# Altium PCB 上板20190911.PCBDOC
Units mm, origin at the board's own origin, x right, y up, seen from the top; angles counter-clockwise.
Board outline 146 x 71.5 mm, 2 copper layers (Top Layer, Bottom Layer); 4 components, 41 nets, 122 pads, 0 vias.
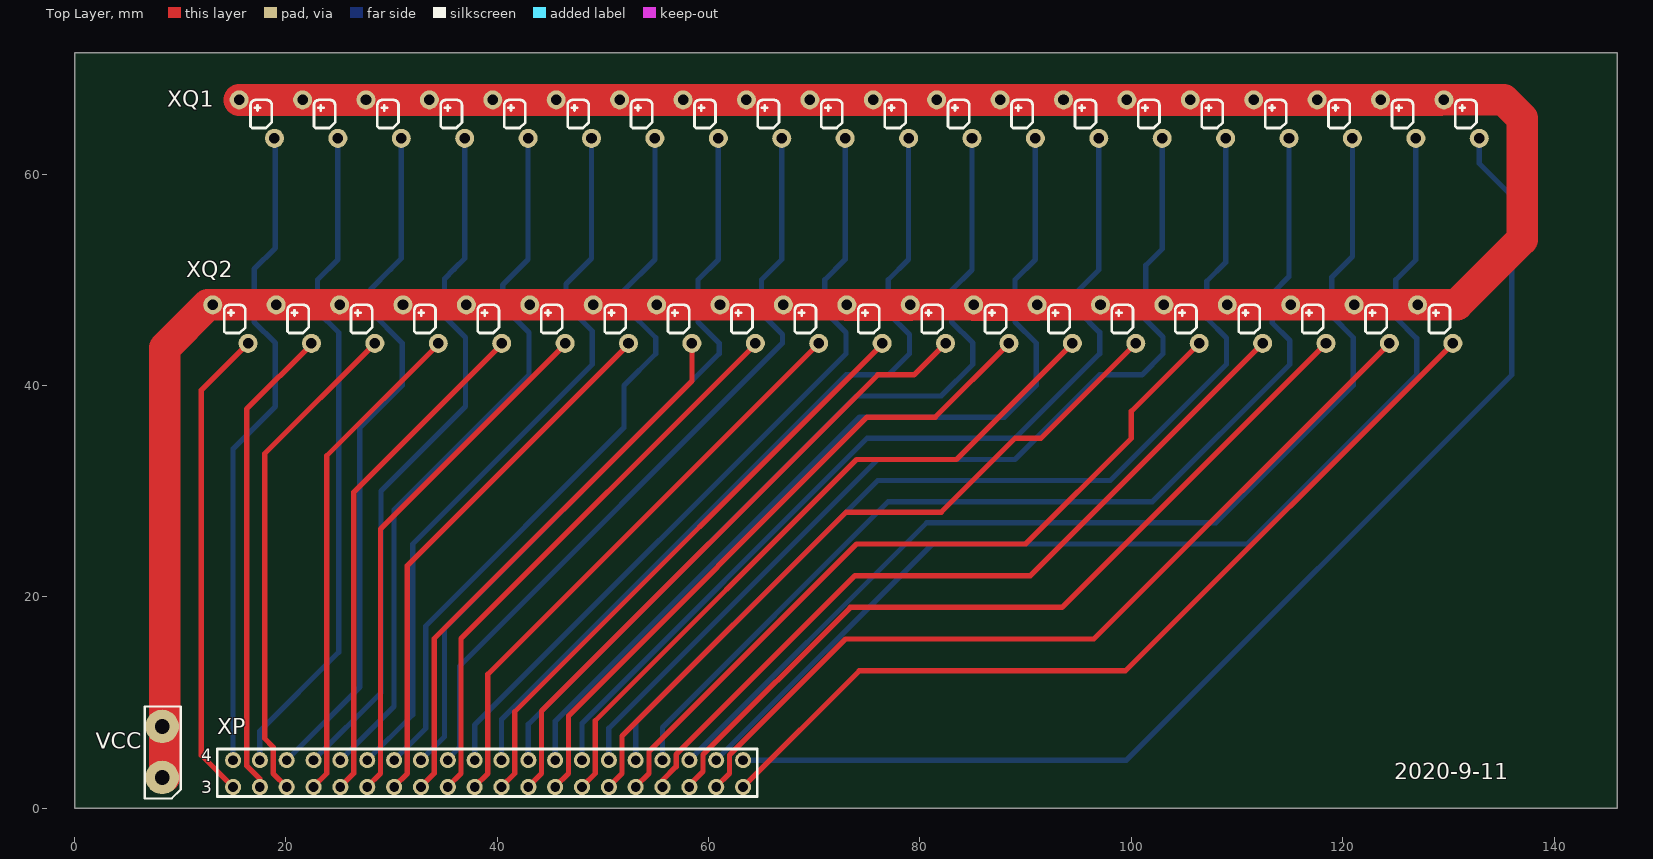
[diagram p0: Top Layer view]
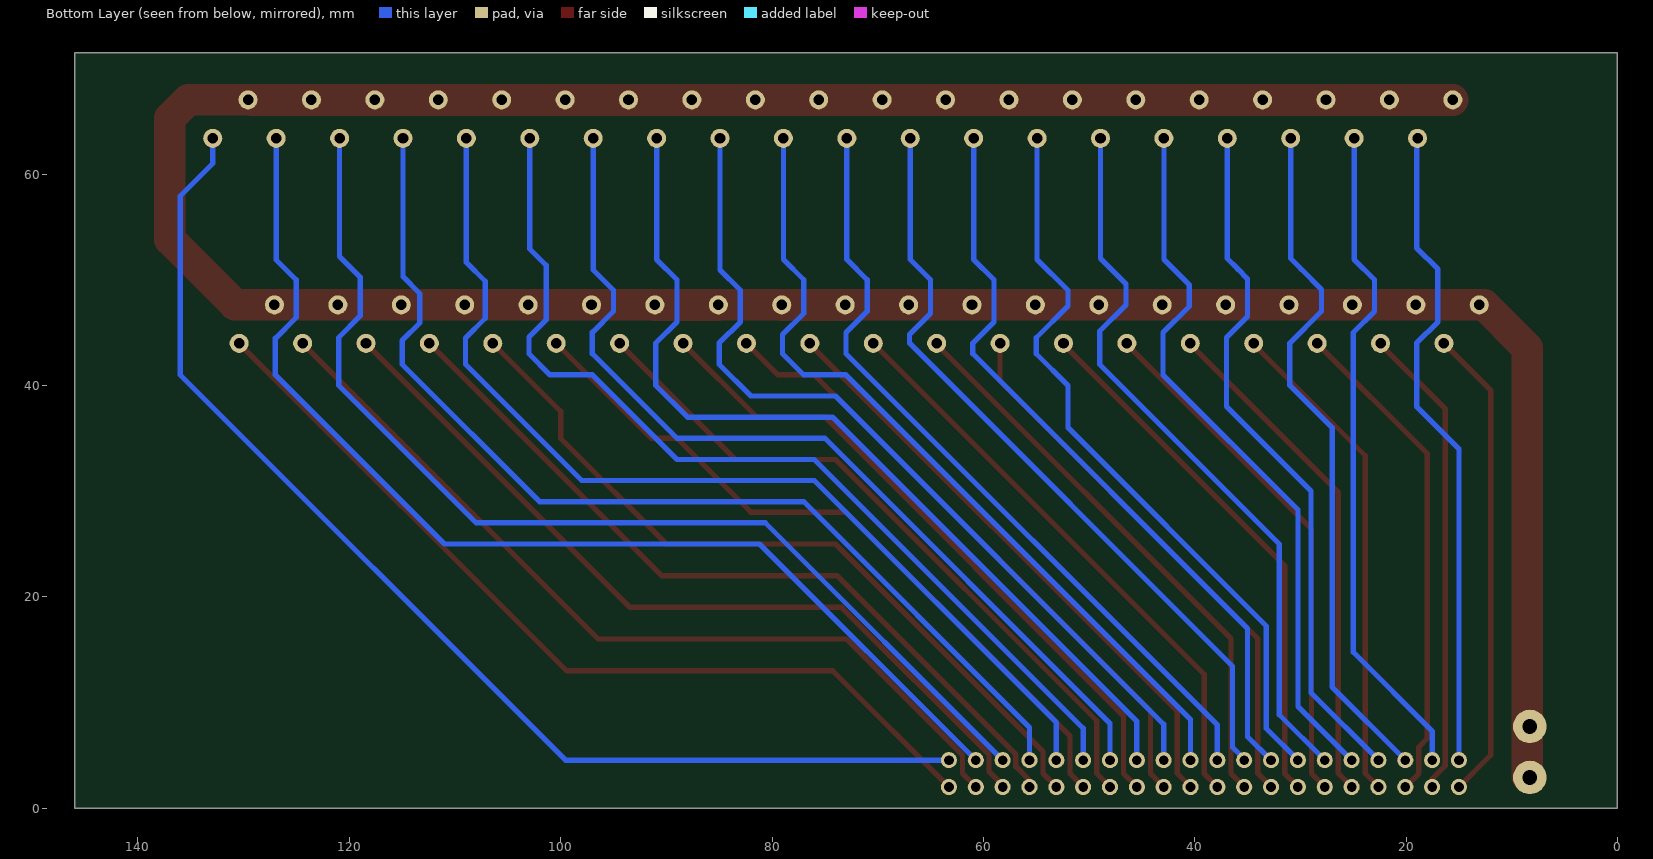
[diagram p1: Bottom Layer view, seen from below]

## Layer stack, top to bottom
Top Solder: solder mask 0.0102, Solder Resist, Dk 3.5
Top Layer: signal copper 0.0356
Dielectric1: dielectric 0.32, FR-4, Dk 4.8
Bottom Layer: signal copper 0.0356
Bottom Solder: solder mask 0.0102, Solder Resist, Dk 3.5

## Board outline
0,0 0,71.5 146,71.5 146,0

## Design rules (kind name [scope] priority, off if disabled: settings)
Clearance [All] p1: gap=0.152 ignorepadtopadclearanceinfootprint=FALSE
DiffPairsRouting [All] p1: maxlimit=0.254 minlimit=0.254 mostfreqgap=0.254 toplayer_minwidth=0.381 toplayer_maxwidth=4 toplayer_prefwidth=0.381 bottomlayer_minwidth=0.381 bottomlayer_maxwidth=4 bottomlayer_prefwidth=0.381 maxuncoupledlength=12.7
FabricationTestPointUsage TestPointUsage [All] p1: valid=0 allowmultiple=FALSE
FabricationTestpoint Testpoint [All] p1: side=3 testpointundercomponent=TRUE minsize=1.016 maxsize=2.54 preferedsize=1.524 minholesize=0 maxholesize=1.016 preferedholesize=0.813 testpointgrid=0.025 allowsidetop=TRUE allowsidebottom=TRUE usegrid=TRUE gridtolerance=0
PolygonConnect [All] p1: connectstyle=Relief reliefconductorwidth=0.254 reliefentries=4 polygonreliefangle="90 Angle" airgapwidth=0.254
RoutingLayers [All] p1: top layer_v5=FALSE bottom layer_v5=TRUE
RoutingVias [All] p1: holewidth=0.8 width=1.6 viastyle="Through Hole" minholewidth=0.711 minwidth=1.27 maxholewidth=0.711 maxwidth=1.27
SilkToSolderMaskClearance SilkscreenOverComponentPads [IsPad] p1: minsilkscreentomaskgap=0.254 clearancetoexposedcopper=TRUE
SolderMaskExpansion [All] p1: expansion=0.102 istentingtop=FALSE
Width [All] p1: maxlimit=3.048 minlimit=0.254 preferedwidth=0.381 minimp=50.000000 maximp=50.000000 favimp=50.000000
25 further rules are at their usual default settings.

## Components (designator, comment, footprint, x,y, rotation, side; value= is the part's Value field where it differs from the comment)
XP "Header 21X2" XinPian 15,2 r180 top
XQ1 "Comment" XIANQUAN1 15.58,67.02 r0 top
XQ2 "Comment" XIANQUAN1 13.08,47.62 r0 top
? "" N1A 8.296,7.736 r180 top

## Footprints (in the part's own frame and the unit in brackets; to place one, negate y for a bottom-side part, rotate by r counter-clockwise, add the part's x,y. Pads: shape width x height; smd on the part's side, far side on the other; paste and mask are expansions set on the pad)
N1A [mil]
  round 125 hole 55: 1(0,0) 2(0,190)
  silkscreen extent -69,-74 65,268
XIANQUAN1 [mm]
  round 1.8 hole 1: 1(3.34,-3.64) 1(9.34,-3.64) 1(15.34,-3.64) 1(21.34,-3.64) 1(27.34,-3.64) 1(33.34,-3.64) 1(39.34,-3.64) 1(45.34,-3.64) 1(51.34,-3.64) 1(57.34,-3.64) 1(63.34,-3.64) 1(69.34,-3.64) 1(75.34,-3.64) 1(81.34,-3.64) 1(87.34,-3.64) 1(93.34,-3.64) 1(99.34,-3.64) 1(105.34,-3.64) 1(111.34,-3.64) 1(117.34,-3.64) 2(0,0) 2(6,0) 2(12,0) 2(18,0) 2(24,0) 2(30,0) 2(36,0) 2(42,0) 2(48,0) 2(54,0) 2(60,0) 2(66,0) 2(72,0) 2(78,0) 2(84,0) 2(90,0) 2(96,0) 2(102,0) 2(108,0) 2(114,0)
  silkscreen extent 1.08,-2.67 117.08,0
XinPian [mil]
  round 60 hole 36: 1(0,-100) 2(-100,-100) 3(-200,-100) 4(-300,-100) 5(-400,-100) 6(-500,-100) 7(-600,-100) 8(-700,-100) 9(-800,-100) 10(-900,-100) 11(-1000,-100) 12(-1100,-100) 13(-1200,-100) 14(-1300,-100) 15(-1400,-100) 16(-1500,-100) 17(-1600,-100) 18(-1700,-100) 19(-1800,-100) 20(-1900,-100) 21(-1900,0) 22(-1800,0) 23(-1700,0) 24(-1600,0) 25(-1500,0) 26(-1400,0) 27(-1300,0) 28(-1200,0) 29(-1100,0) 30(-1000,0) 31(-900,0) 32(-800,0) 33(-700,0) 34(-600,0) 35(-500,0) 36(-400,0) 37(-300,0) 38(-200,0) 39(-100,0) 40(0,0)
  silkscreen extent -1953,-142 59,35

## Part data
XP: library part "Header 22X2", "Header, 22-Pin, Dual row"

## Nets (pads, with @x,y where several pads share a name; then routed paths per layer and width w, separated by ;. In a path a pad name is that pad's centre, name@x,y a point inside that pad or via, vN(x,y) a via of type N, cw(c..) or ccw(c..) an arc to the next point about the centre after c; other vN are vias at no path point)
GND: ?.1 ?.2 XQ1.2 XQ2.2 | length 307
  Top Layer w3: ?.1@8.376,7.736 8.329,7.784 8.329,7.817 8.54,8.028 8.54,43.54 12.62,47.62 13.08,47.62 19.08,47.62 25.08,47.62 31.08,47.62 37.08,47.62 43.08,47.62 49.08,47.62 55.08,47.62 61.08,47.62 67.08,47.62 73.08,47.62 73.09,47.61 79.07,47.61 79.08,47.62 85.08,47.62 85.09,47.61 91.07,47.61 91.08,47.62 97.08,47.62 103.08,47.62 109.08,47.62 115.08,47.62 121.08,47.62 127.08,47.62 130.809,47.62 137,53.811 137,65.273 135.243,67.03 129.58,67.03 129.261,67.03 129.231,67 123.58,67 117.58,67 111.58,67 105.58,67 99.58,67 93.58,67 87.58,67 81.58,67 75.58,67 69.58,67 69.231,67 63.58,67 57.58,67 51.58,67 45.58,67 39.58,67 33.58,67 27.58,67 21.58,67 XQ1.2@15.58,67 ; ?.2@8.54,3 ?.1@8.54,7.736
XQ1_1: XP.20 XQ1.1@132.92,63.38 | length 111.5
  Bottom Layer w0.5: XP.20 99.54,4.54 136,41 136,57.931 132.92,61.011 XQ1.1@132.92,63.38
XQ1_2: XP.19 XQ1.1@126.92,63.38 | length 105.4
  Bottom Layer w0.5: XP.19 81.18,25 111,25 127,41 127,44.45 125.019,46.431 125.019,49.987 126.92,51.888 XQ1.1@126.92,63.38
XQ1_3: XP.18 XQ1.1@120.92,63.38 | length 102.5
  Bottom Layer w0.5: XP.18 80.64,27 108,27 121,40 121,44.532 118.974,46.558 118.974,50.267 120.92,52.213 XQ1.1@120.92,63.38
XQ1_4: XP.17 XQ1.1@114.92,63.38 | length 99.4
  Bottom Layer w0.5: XP.17 55.64,7.64 77,29 102,29 115,42 115,44.233 113.335,45.898 113.335,48.705 114.92,50.29 XQ1.1@114.92,63.38
XQ1_5: XP.16 XQ1.1@108.92,63.38 | length 96.4
  Bottom Layer w0.5: XP.16 53.1,8.1 76,31 98,31 109,42 109,44.492 107.137,46.355 107.137,49.86 108.92,51.643 XQ1.1@108.92,63.38
XQ1_6: XP.15 XQ1.1@102.92,63.38 | length 91.8
  Bottom Layer w0.5: XP.15 50.56,7.56 76,33 89,33 97,41 101,41 103,43 103,44.574 101.371,46.203 101.371,51.371 102.92,52.92 XQ1.1@102.92,63.38
XQ1_7: XP.14 XQ1.1@96.92,63.38 | length 89
  Bottom Layer w0.5: XP.14 48.02,8.02 75,35 89,35 97,43 97,45.019 95,47.019 95,49 96.92,50.92 XQ1.1@96.92,63.38
XQ1_8: XP.13 XQ1.1@90.92,63.38 | length 87.4
  Bottom Layer w0.5: XP.13 45.48,8.209 74.271,37 88,37 91,40 91,44 89,46 89,50 90.92,51.92 XQ1.1@90.92,63.38
XQ1_9: XP.12 XQ1.1@84.92,63.38 | length 82.6
  Bottom Layer w0.5: XP.12 42.94,7.94 74,39 82,39 85,42 85,44 83,46 83,49 84.92,50.92 XQ1.1@84.92,63.38
XQ1_10: XP.11 XQ1.1@78.92,63.38 | length 78.8
  Bottom Layer w0.5: XP.11 40.4,8.4 73,41 77,41 79,43 79,44.803 77,46.803 77,50 78.92,51.92 XQ1.1@78.92,63.38
XQ1_11: XP.10 XQ1.1@72.92,63.38 | length 75
  Bottom Layer w0.5: XP.10 37.86,7.86 73,43 73,45 71,47 71,50 72.92,51.92 XQ1.1@72.92,63.38
XQ1_12: XP.9 XQ1.1@66.92,63.38 | length 73.6
  Bottom Layer w0.5: XP.9 35.32,4.665 36.423,5.768 36.423,13.423 67,44 67,44.803 65,46.803 65,50 66.92,51.92 XQ1.1@66.92,63.38
XQ1_13: XP.8 XQ1.1@60.92,63.38 | length 72.2
  Bottom Layer w0.5: XP.8 35,6.76 35,17 61,43 61,44 59,46 59,50 60.92,51.92 XQ1.1@60.92,63.38
XQ1_14: XP.7 XQ1.1@54.92,63.38 | length 71.5
  Bottom Layer w0.5: XP.7 33.231,7.531 33.231,17.231 52,36 52,40 55,43 55,44.51 52,47.51 52,49 54.92,51.92 XQ1.1@54.92,63.38
XQ1_15: XP.6 XQ1.1@48.92,63.38 | length 69.7
  Bottom Layer w0.5: XP.6 32,8.84 32,25 49,42 49,45.13 46.51,47.62 46.51,49.591 47.919,51 48.92,52.001 XQ1.1@48.92,63.38
XQ1_16: XP.5 XQ1.1@42.92,63.38 | length 68.3
  Bottom Layer w0.5: XP.5 30.24,9.62 30.24,28.24 43,41 43,45 40.51,47.49 40.51,49.51 42.92,51.92 XQ1.1@42.92,63.38
XQ1_17: XP.4 XQ1.1@36.92,63.38 | length 66.4
  Bottom Layer w0.5: XP.4 29,10.92 29,30 37,38 37,44.529 35,46.529 35,50.081 35.919,51 36.92,52.001 XQ1.1@36.92,63.38
XQ1_18: XP.3 XQ1.1@30.92,63.38 | length 65.8
  Bottom Layer w0.5: XP.3 27,11.46 27,36 31,40 31,44.019 28,47.019 28,49.081 29.919,51 30.92,52.001 XQ1.1@30.92,63.38
XQ1_19: XP.2 XQ1.1@24.92,63.38 | length 63.6
  Bottom Layer w0.5: XP.2 17.54,7.3 25,14.76 25,45 23,47 23,50 24.92,51.92 XQ1.1@24.92,63.38
XQ1_20: XP.1 XQ1.1@18.92,63.38 | length 62.2
  Bottom Layer w0.5: XP.1 15,34 19,38 19,44 17,46 17,51 19,53 19,63.37 XQ1.1@19.01,63.38
XQ2_1: XP.21 XQ2.1@130.42,43.98 | length 84.5
  Top Layer w0.5: XP.21 74.26,13 99.44,13 XQ2.1@130.42,43.98
XQ2_2: XP.22 XQ2.1@124.42,43.98 | length 82.1
  Top Layer w0.381: XP.22 XP.22@60.72,2.035
  Top Layer w0.5: XP.22@60.72,2.035 61.972,3.287 61.972,5.024 72.949,16 96.44,16 XQ2.1@124.42,43.98
XQ2_3: XP.23 XQ2.1@118.42,43.98 | length 78.7
  Top Layer w0.381: XP.23 XP.23@58.18,2.18
  Top Layer w0.5: XP.23@58.18,2.18 59.467,3.467 59.467,5.059 73.409,19 93.44,19 XQ2.1@118.42,43.98
XQ2_4: XP.24 XQ2.1@112.42,43.98 | length 75.2
  Top Layer w0.381: XP.24 XP.24@55.64,2.64
  Top Layer w0.5: XP.24@55.64,2.64 56.927,3.928 56.927,5.059 73.869,22 90.44,22 XQ2.1@112.42,43.98
XQ2_5: XP.25 XQ2.1@106.42,43.98 | length 73.4
  Top Layer w0.381: XP.25 XP.25@53.1,2.035
  Top Layer w0.5: XP.25@53.1,2.035 54.352,3.287 54.352,5.352 74,25 90,25 100,35 100,37.56 XQ2.1@106.42,43.98
XQ2_6: XP.26 XQ2.1@100.42,43.98 | length 69.3
  Top Layer w0.381: XP.26 XP.26@50.56,2.035
  Top Layer w0.5: XP.26@50.56,2.035 51.812,3.287 51.812,6.812 73,28 82,28 89,35 91.44,35 XQ2.1@100.42,43.98
XQ2_7: XP.27 XQ2.1@94.42,43.98 | length 66.7
  Top Layer w0.381: XP.27 XP.27@48.02,2.035
  Top Layer w0.5: XP.27@48.02,2.035 49.272,3.287 49.272,8.272 74,33 83.44,33 XQ2.1@94.42,43.98
XQ2_8: XP.28 XQ2.1@88.42,43.98 | length 63.5
  Top Layer w0.381: XP.28 XP.28@45.48,2.035
  Top Layer w0.5: XP.28@45.48,2.035 46.732,3.287 46.732,8.732 75,37 81.44,37 XQ2.1@88.42,43.98
XQ2_9: XP.29 XQ2.1@82.42,43.98 | length 60.3
  Top Layer w0.381: XP.29 XP.29@42.94,2.035
  Top Layer w0.5: XP.29@42.94,2.035 44.192,3.287 44.192,5.383 44.192,9.192 76,41 79.44,41 XQ2.1@82.42,43.98
XQ2_10: XP.30 XQ2.1@76.42,43.98 | length 56.9
  Top Layer w0.381: XP.30 XP.30@40.4,2.035
  Top Layer w0.5: XP.30@40.4,2.035 41.652,3.287 41.652,9.122 XQ2.1@76.51,43.98
XQ2_11: XP.31 XQ2.1@70.42,43.98 | length 55.5
  Top Layer w0.381: XP.31 XP.31@37.86,2.035
  Top Layer w0.5: XP.31@37.86,2.035 39.112,3.287 39.112,12.672 XQ2.1@70.42,43.98
XQ2_12: XP.32 XQ2.1@64.42,43.98 | length 54.1
  Top Layer w0.381: XP.32 XP.32@35.32,2.035
  Top Layer w0.5: XP.32@35.32,2.035 36.572,3.287 36.572,16.042 XQ2.1@64.51,43.98
XQ2_13: XP.33 XQ2.1@58.42,43.98 | length 52.6
  Top Layer w0.381: XP.33 XP.33@32.78,2.035
  Top Layer w0.5: XP.33@32.78,2.035 34.032,3.287 34.032,16.032 58.42,40.42 XQ2.1@58.42,43.98
XQ2_14: XP.34 XQ2.1@52.42,43.98 | length 51.2
  Top Layer w0.381: XP.34 XP.34@30.24,2.035
  Top Layer w0.5: XP.34@30.24,2.035 31.492,3.287 31.492,22.962 XQ2.1@52.51,43.98
XQ2_15: XP.35 XQ2.1@46.42,43.98 | length 49.8
  Top Layer w0.381: XP.35 XP.35@27.7,2.035
  Top Layer w0.5: XP.35@27.7,2.035 28.952,3.287 28.952,26.422 XQ2.1@46.51,43.98
XQ2_16: XP.36 XQ2.1@40.42,43.98 | length 48.3
  Top Layer w0.381: XP.36 XP.36@25.16,2.035
  Top Layer w0.5: XP.36@25.16,2.035 26.412,3.287 26.412,29.882 XQ2.1@40.51,43.98
XQ2_17: XP.37 XQ2.1@34.42,43.98 | length 46.9
  Top Layer w0.381: XP.37 XP.37@22.62,2.035
  Top Layer w0.5: XP.37@22.62,2.035 23.872,3.287 23.872,33.342 XQ2.1@34.51,43.98
XQ2_18: XP.38 XQ2.1@28.42,43.98 | length 47.2
  Top Layer w0.5: XP.38 18.792,3.287 18.792,5.792 18,6.585 18,33.56 XQ2.1@28.42,43.98
XQ2_19: XP.39 XQ2.1@22.42,43.98 | length 45.1
  Top Layer w0.5: XP.39 17.54,2.769 16.287,4.021 16.287,37.757 XQ2.1@22.51,43.98
XQ2_20: XP.40 XQ2.1@16.42,43.98 | length 45.1
  Top Layer w0.5: XP.40 12,5 12,39.56 XQ2.1@16.42,43.98

## Silkscreen, mask and mechanical layers (free items; w line width, h text height)
Top Overlay:
  text "VCC" at 2,5.6 h1.52
  text "4" at 12,4 h2.02
  text "2020-9-11" at 124.86,2.756 h1.52
  text "3" at 12,1 h2.02
Mechanical 1:
  circle w0.254: c5.5,61 r1.5
  circle w0.254: c14.75,57.99 r0.65
  circle w0.254: c17.25,57.99 r0.65
  circle w0.254: c14.75,55.49 r0.65
  circle w0.254: c71.25,55.49 r0.65
  circle w0.254: c71.25,57.99 r0.65
  circle w0.254: c71.25,52.99 r0.65
  circle w0.254: c68.75,55.49 r0.65
  circle w0.254: c68.75,57.99 r0.65
  circle w0.254: c68.75,52.99 r0.65
  circle w0.254: c74.75,52.99 r0.65
  circle w0.254: c74.75,57.99 r0.65
  circle w0.254: c74.75,55.49 r0.65
  circle w0.254: c77.25,52.99 r0.65
  circle w0.254: c77.25,57.99 r0.65
  circle w0.254: c77.25,55.49 r0.65
  circle w0.254: c80.75,52.99 r0.65
  circle w0.254: c80.75,57.99 r0.65
  circle w0.254: c80.75,55.49 r0.65
  circle w0.254: c83.25,52.99 r0.65
  circle w0.254: c83.25,57.99 r0.65
  circle w0.254: c83.25,55.49 r0.65
  circle w0.254: c86.75,52.99 r0.65
  circle w0.254: c86.75,57.99 r0.65
  circle w0.254: c86.75,55.49 r0.65
  circle w0.254: c89.25,52.99 r0.65
  circle w0.254: c89.25,57.99 r0.65
  circle w0.254: c89.25,55.49 r0.65
  circle w0.254: c92.75,52.99 r0.65
  circle w0.254: c92.75,57.99 r0.65
  circle w0.254: c92.75,55.49 r0.65
  circle w0.254: c95.25,52.99 r0.65
  circle w0.254: c95.25,57.99 r0.65
  circle w0.254: c95.25,55.49 r0.65
  circle w0.254: c98.75,52.99 r0.65
  circle w0.254: c98.75,57.99 r0.65
  circle w0.254: c98.75,55.49 r0.65
  circle w0.254: c101.25,52.99 r0.65
  circle w0.254: c101.25,57.99 r0.65
  circle w0.254: c101.25,55.49 r0.65
  circle w0.254: c104.75,52.99 r0.65
  circle w0.254: c104.75,57.99 r0.65
  circle w0.254: c104.75,55.49 r0.65
  circle w0.254: c107.25,52.99 r0.65
  circle w0.254: c107.25,57.99 r0.65
  circle w0.254: c107.25,55.49 r0.65
  circle w0.254: c110.75,52.99 r0.65
  circle w0.254: c110.75,57.99 r0.65
  circle w0.254: c110.75,55.49 r0.65
  circle w0.254: c113.25,52.99 r0.65
  circle w0.254: c113.25,57.99 r0.65
  circle w0.254: c113.25,55.49 r0.65
  circle w0.254: c116.75,52.99 r0.65
  circle w0.254: c116.75,57.99 r0.65
  circle w0.254: c116.75,55.49 r0.65
  circle w0.254: c119.25,52.99 r0.65
  circle w0.254: c119.25,57.99 r0.65
  circle w0.254: c119.25,55.49 r0.65
  circle w0.254: c122.75,52.99 r0.65
  circle w0.254: c122.75,57.99 r0.65
  circle w0.254: c122.75,55.49 r0.65
  circle w0.254: c125.25,52.99 r0.65
  circle w0.254: c125.25,57.99 r0.65
  circle w0.254: c125.25,55.49 r0.65
  circle w0.254: c128.75,52.99 r0.65
  circle w0.254: c128.75,57.99 r0.65
  circle w0.254: c128.75,55.49 r0.65
  circle w0.254: c131.25,52.99 r0.65
  circle w0.254: c131.25,57.99 r0.65
  circle w0.254: c131.25,55.49 r0.65
  circle w0.254: c62.75,52.99 r0.65
  circle w0.254: c62.75,57.99 r0.65
  circle w0.254: c62.75,55.49 r0.65
  circle w0.254: c65.25,52.99 r0.65
  circle w0.254: c65.25,57.99 r0.65
  circle w0.254: c65.25,55.49 r0.65
  circle w0.254: c56.75,52.99 r0.65
  circle w0.254: c56.75,57.99 r0.65
  circle w0.254: c56.75,55.49 r0.65
  circle w0.254: c59.25,52.99 r0.65
  circle w0.254: c59.25,57.99 r0.65
  circle w0.254: c59.25,55.49 r0.65
  circle w0.254: c50.75,52.99 r0.65
  circle w0.254: c50.75,57.99 r0.65
  circle w0.254: c50.75,55.49 r0.65
  circle w0.254: c53.25,52.99 r0.65
  circle w0.254: c53.25,57.99 r0.65
  circle w0.254: c53.25,55.49 r0.65
  circle w0.254: c44.75,52.99 r0.65
  circle w0.254: c44.75,57.99 r0.65
  circle w0.254: c44.75,55.49 r0.65
  circle w0.254: c47.25,52.99 r0.65
  circle w0.254: c47.25,57.99 r0.65
  circle w0.254: c47.25,55.49 r0.65
  circle w0.254: c38.75,52.99 r0.65
  circle w0.254: c38.75,57.99 r0.65
  circle w0.254: c38.75,55.49 r0.65
  circle w0.254: c41.25,52.99 r0.65
  circle w0.254: c41.25,57.99 r0.65
  circle w0.254: c41.25,55.49 r0.65
  circle w0.254: c32.75,52.99 r0.65
  circle w0.254: c32.75,57.99 r0.65
  circle w0.254: c32.75,55.49 r0.65
  circle w0.254: c35.25,52.99 r0.65
  circle w0.254: c35.25,57.99 r0.65
  circle w0.254: c35.25,55.49 r0.65
  circle w0.254: c26.75,52.99 r0.65
  circle w0.254: c26.75,57.99 r0.65
  circle w0.254: c26.75,55.49 r0.65
  circle w0.254: c29.25,52.99 r0.65
  circle w0.254: c29.25,57.99 r0.65
  circle w0.254: c29.25,55.49 r0.65
  circle w0.254: c20.75,52.99 r0.65
  circle w0.254: c20.75,57.99 r0.65
  circle w0.254: c20.75,55.49 r0.65
  circle w0.254: c23.25,52.99 r0.65
  circle w0.254: c23.25,57.99 r0.65
  circle w0.254: c23.25,55.49 r0.65
  circle w0.254: c14.75,52.99 r0.65
  circle w0.254: c17.25,52.99 r0.65
  circle w0.254: c17.25,55.49 r0.65
  circle w0.254: c5.5,55.5 r1.5
  circle w0.254: c5.5,50 r1.5
  circle w0.254: c140.5,50 r1.5
  circle w0.254: c140.5,55.5 r1.5
  circle w0.254: c140.5,61 r1.5
  circle w0.254: c49,36 r1.5
  circle w0.254: c97,36 r1.5
  lines w0.254: 0,0 0,71.5 146,71.5 146,0 0,0